# Altium PCB PCB_Proxxon_PWM.PcbDoc
Units mm, origin at the board's own origin, x right, y up, seen from the top; angles counter-clockwise.
Board outline 55 x 30.2 mm, 2 copper layers (Top Layer, Bottom Layer); 29 components, 26 nets, 115 pads, 4 vias.
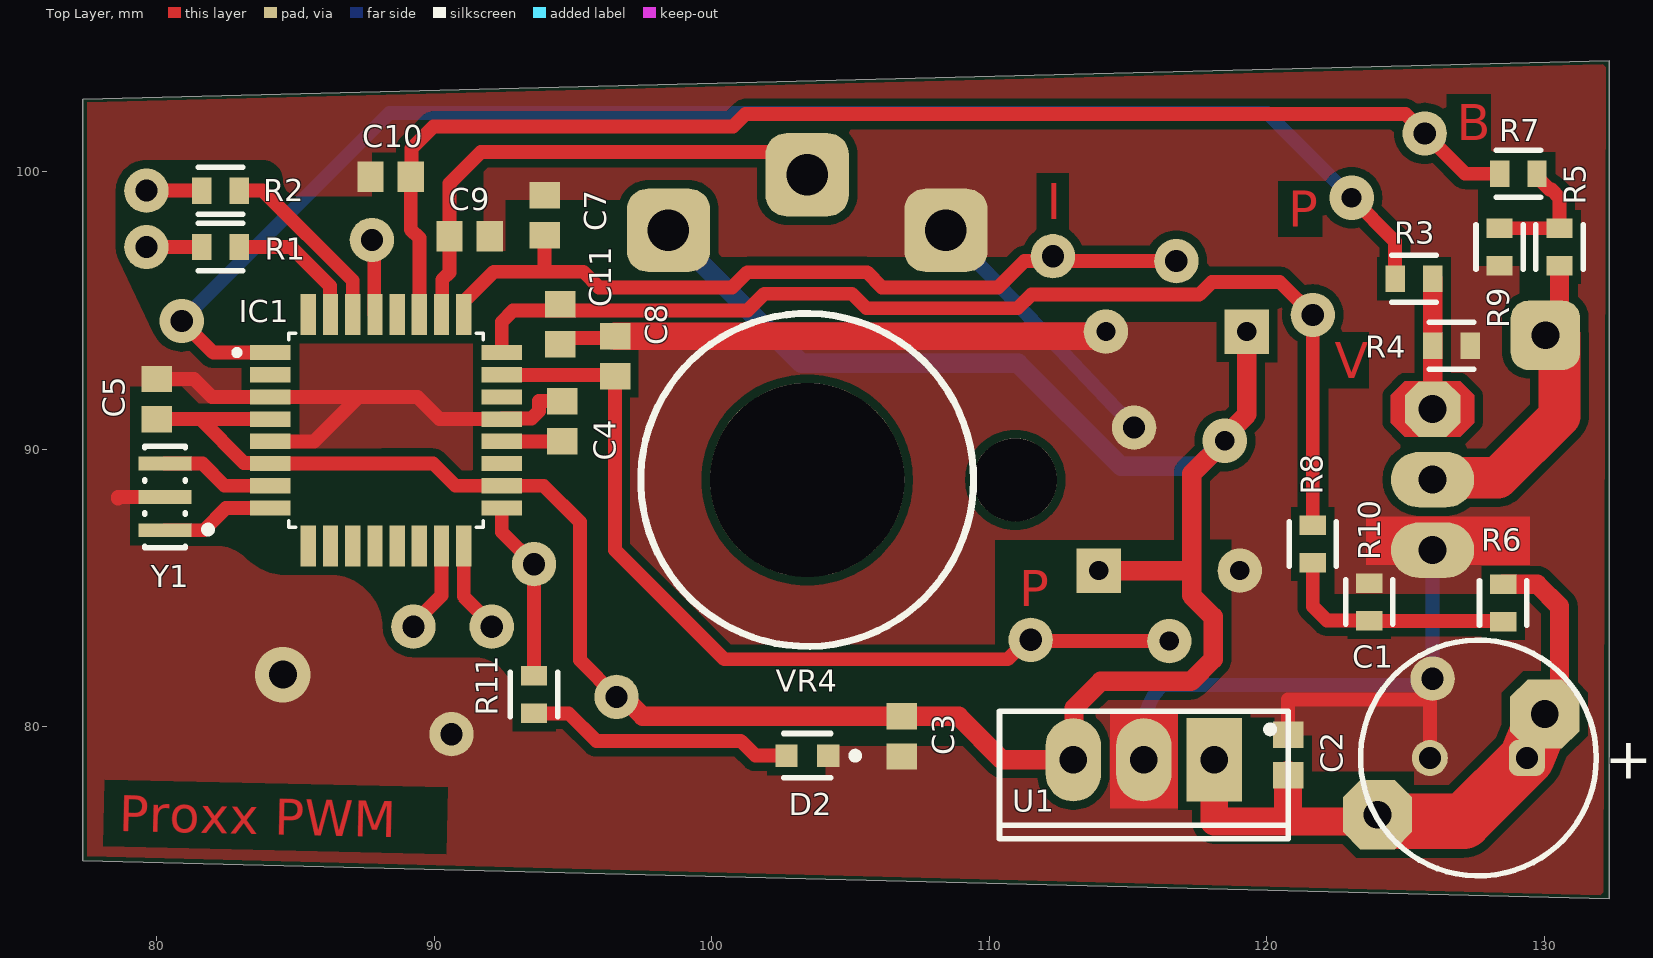
[diagram p0: Top Layer view]
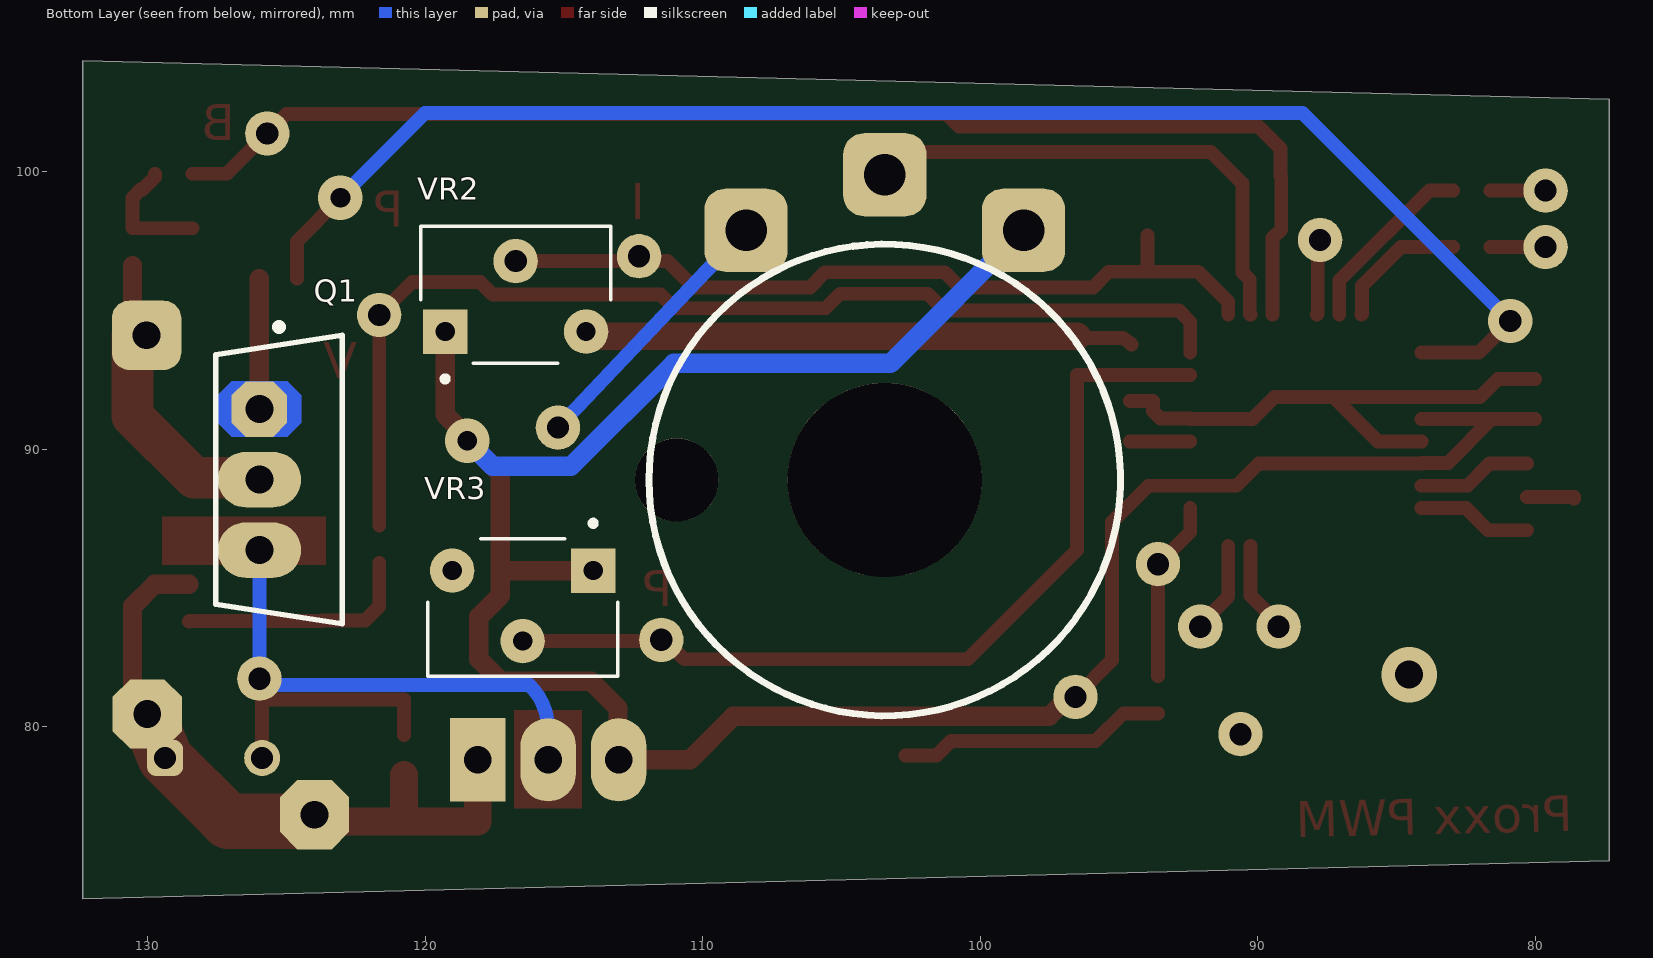
[diagram p1: Bottom Layer view, seen from below]
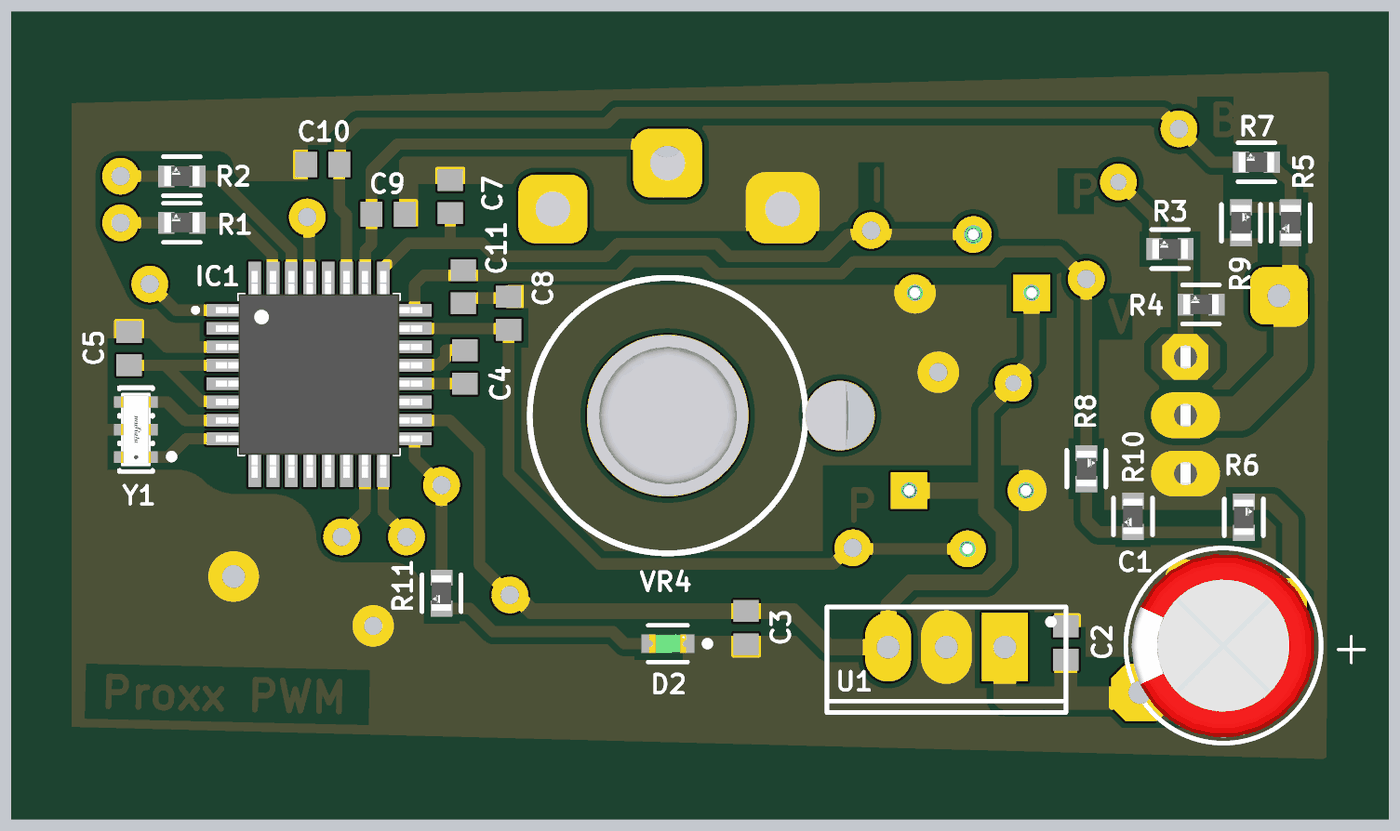
[diagram p2: 3D render of the assembled board from above, using the file's embedded part models]
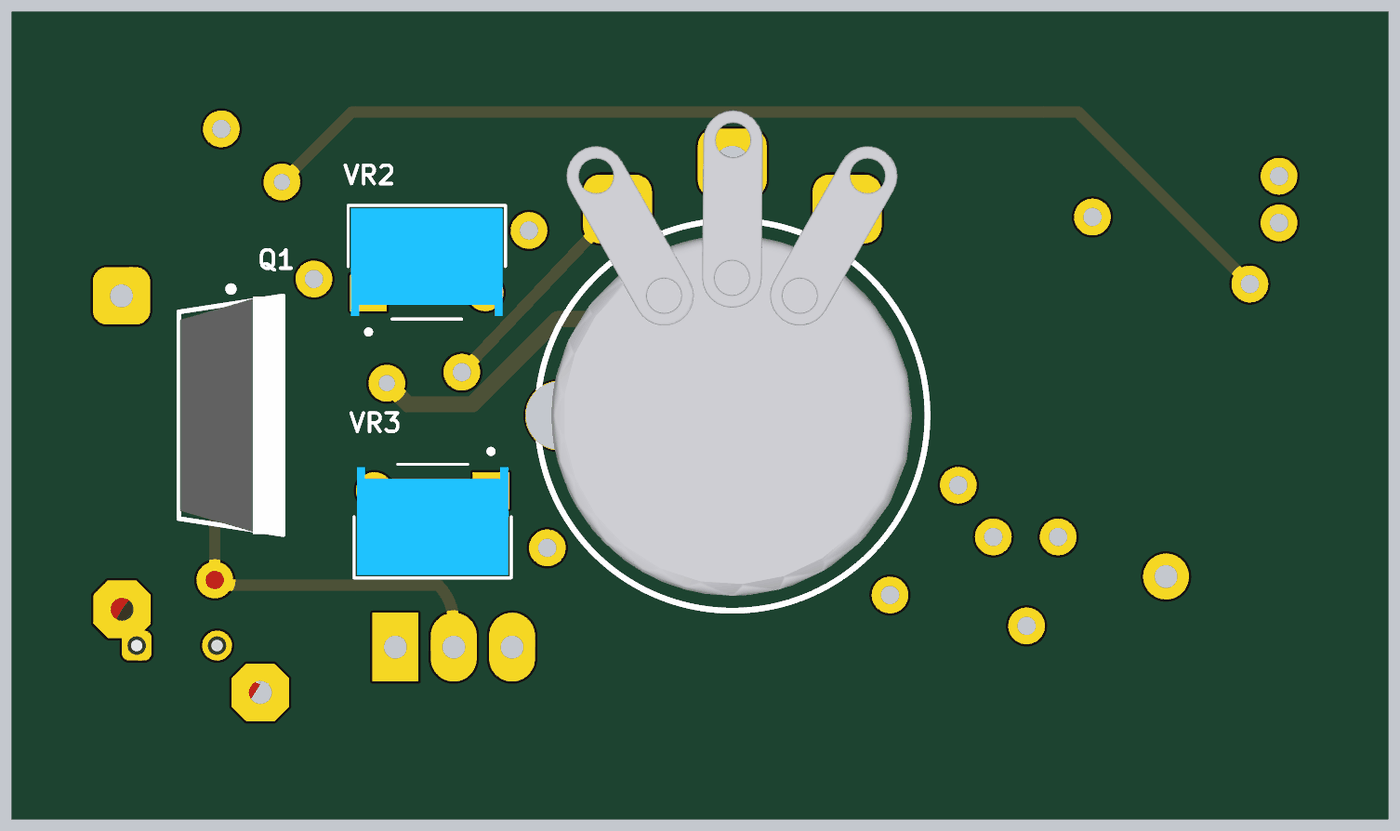
[diagram p3: 3D render of the assembled board from below, using the file's embedded part models]

## Layer stack, top to bottom
Top Solder: solder mask 0.0102, Solder Resist, Dk 3.5
Top Layer: signal copper 0.0356
Dielectric 1: dielectric 0.32, FR-4, Dk 4.8
Bottom Layer: signal copper 0.0356
Bottom Solder: solder mask 0.0102, Solder Resist, Dk 3.5

## Board outline
77.343,75.162 132.342,73.787 132.342,103.987 77.343,102.612

## Design rules (kind name [scope] priority, off if disabled: settings)
Clearance [All] p1: gap=0.3 ignorepadtopadclearanceinfootprint=FALSE except(0.1: Arc-Track Arc-SMDPad Track-Track Track-SMDPad Track-THPad SMDPad-SMDPad)
PlaneClearance [All] p1: clearance=0.6
PlaneConnect [All] p1: planeconnectstyle=Direct reliefexpansion=0.508 reliefentries=4 reliefconductorwidth=0.4 reliefairgap=0.254
PolygonConnect [All] p1: connectstyle=Direct reliefconductorwidth=0.5 reliefentries=4 polygonreliefangle="90 Angle" airgapwidth=0.254
RoutingVias [All] p1: holewidth=0.711 width=1.27 viastyle="Through Hole" minholewidth=0.711 minwidth=1.27 maxholewidth=0.711 maxwidth=1.27
SolderMaskExpansion [All] p1: expansion=0.102 istentingtop=FALSE
SupplyNets "Schematic Supply Nets_3" [InNet('+12V')] p1: voltage=0.000
SupplyNets "Schematic Supply Nets_2" [InNet('5V')] p2: voltage=0.000
SupplyNets "Schematic Supply Nets_1" [InNet('GND')] p3: voltage=0.000
SupplyNets "Schematic Supply Nets" [InNet('Vin')] p4: voltage=0.000
Width [All] p1: maxlimit=3 minlimit=0.15 preferedwidth=0.254
28 further rules are at their usual default settings.

## Components (designator, comment, footprint, x,y, rotation, side; value= is the part's Value field where it differs from the comment)
C1 "100uF" WCAP-ATLL_D8H11.5 127.635,78.867 r0 top
C2 "0.1uF" CAPC1608X92X38ML15T08 120.775,78.975 r270 top
C3 "0.1uF" CAPC1608X92X38ML15T08 106.857,79.644 r90 top
C4 "100nF" CAPC1608X92X38ML15T08 94.615,91.003 r90 top
C5 "1uF" CAPC1608X92X38ML15T08 80,91.803 r270 top
C7 "0.1uF" CAPC1608X92X38ML15T08 93.98,98.425 r270 top
C8 "0.1uF" CAPC1608X92X38ML15T08 96.52,93.345 r270 top
C9 "0.1uF" CAPC1608X92X38ML15T08 91.276,97.663 r180 top
C10 "0.1uF" CAPC1608X92X38ML15T08 88.429,99.822 r0 top
C11 "0.1uF" CAPC1608X92X38ML15T08 94.55,94.5 r90 top
D2 "LG Q396-PS-35" FP-LG_Q396-MFG 103.45,78.95 r180 top
IC1 "ATMEGA328PB-AU" QFP80P900X900X120-32N 88.265,90.678 r0 top
Q1 "IRLZ44" FP-PG-TO220-3-MFG 125.279,88.9 r180 bottom
R1 "1k" FP-MCT0603-MFG 82.296,97.282 r180 top
R2 "1k" FP-MCT0603-MFG 82.296,99.314 r180 top
R3 "100" FP-MCT0603-MFG 125.309,96.139 r180 top
R4 "10k" FP-MCT0603-MFG 126.659,93.726 r180 top
R5 "10k" FP-MCT0603-MFG 130.556,97.282 r270 top
R6 "10k" FP-MCT0603-MFG 128.524,84.455 r90 top
R7 "10k" FP-MCT0603-MFG 129.072,99.924 r180 top
R8 "10k" FP-MCT0603-MFG 121.666,86.574 r90 top
R9 "4k7" FP-MCT0603-MFG 128.397,97.282 r90 top
R10 "4k7" FP-MCT0603-MFG 123.698,84.495 r270 top
R11 "1k" FP-MCT0603-MFG 93.599,81.15 r270 top
U1 "L7805ABV" TO220 115.575,78.8 r180 top
VR2 "KI" TRIM_3362W-1-203LF#1 116.748,95.504 r0 bottom value=1k
VR3 "KP" TRIM_3362W-1-203LF#2 116.494,84.351 r180 bottom value=1k
VR4 "Speed" RES-VAR 103.443,88.887 r0 top value=92k
Y1 "CSTNE20M0VH3C000R0" FP-CSTNE20M0VH3C000R0-MFG 80.3,88.275 r90 top

## Footprints (in the part's own frame and the unit in brackets; to place one, negate y for a bottom-side part, rotate by r counter-clockwise, add the part's x,y. Pads: shape width x height; smd on the part's side, far side on the other; paste and mask are expansions set on the pad)
CAPC1608X92X38ML15T08 [mm] "Chip Capacitor, 2-Leads, Body 1.60x0.80mm, IPC Low Density"
  rect 0.95x1.1 smd: 1(-0.725,0) 2(0.725,0)
  body extent -0.87,-0.48 0.87,0.47, height 0.92
FP-CSTNE20M0VH3C000R0-MFG [mm]
  rect 0.5x1.9 smd paste+0 mask+0: 1(-1.2,0) 2(0,0) 3(1.2,0)
  silkscreen extent -1.83,-1.68 1.83,0.72, body extent -1.78,-1.05 1.78,1.05, height 0.25
FP-LG_Q396-MFG [mm]
  rect 0.8x0.8 smd paste+0 mask+0: 1(-0.75,0) 2(0.75,0)
  silkscreen extent -1.85,-0.8 0.85,0.8, body extent -1.25,-0.55 1.25,0.55, height 0.25
FP-MCT0603-MFG [mm]
  rect 0.7x0.95 smd paste+0 mask+0: 1(-0.675,0) 2(0.675,0)
  silkscreen extent -0.8,-0.85 0.8,0.85, body extent -1.12,-0.58 1.12,0.58, height 0.25
FP-PG-TO220-3-MFG [mm]
  oct 2x2 hole 1 paste-2539.97 mask+0: 1(-0.705,2.54)
  oval 3x2 hole 1 paste-2539.97 mask+0: 2(-0.705,0) 3(-0.705,-2.54)
  Top Layer region: -1.705,3.54 -2.205,3.04 -2.205,2.04 -1.705,1.54 0.295,1.54 0.795,2.04 0.795,3.04 0.295,3.54
  Bottom Layer region: -1.705,3.54 -2.205,3.04 -2.205,2.04 -1.705,1.54 0.295,1.54 0.795,2.04 0.795,3.04 0.295,3.54
  silkscreen extent -2.27,-5.2 2.27,5.62, body extent -2.23,-5.18 2.22,5.18, height 19.15
QFP80P900X900X120-32N [mm]
  rect 1.47x0.55 smd paste+0 mask+0.102: 1(-4.17,2.8) 2(-4.17,2) 3(-4.17,1.2) 4(-4.17,0.4) 5(-4.17,-0.4) 6(-4.17,-1.2) 7(-4.17,-2) 8(-4.17,-2.8) 17(4.17,-2.8) 18(4.17,-2) 19(4.17,-1.2) 20(4.17,-0.4) 21(4.17,0.4) 22(4.17,1.2) 23(4.17,2) 24(4.17,2.8)
  rect 0.55x1.47 smd paste+0 mask+0.102: 9(-2.8,-4.17) 10(-2,-4.17) 11(-1.2,-4.17) 12(-0.4,-4.17) 13(0.4,-4.17) 14(1.2,-4.17) 15(2,-4.17) 16(2.8,-4.17) 25(2.8,4.17) 26(2,4.17) 27(1.2,4.17) 28(0.4,4.17) 29(-0.4,4.17) 30(-1.2,4.17) 31(-2,4.17) 32(-2.8,4.17)
  silkscreen extent -5.47,-3.5 3.5,3.5, body extent -4.5,-4.5 4.5,4.5, height 1.2
RES-VAR [mm]
  round 1.524 hole 7: 0(0,0)
  round 1.524 hole 3: 0(7.5,0)
  rrect50% 3x3 hole 1.5: 1(-5,9) 2(0,11) 3(5,9)
  silkscreen extent -6,-6 6,6, body extent -7.84,-7.85 7.86,13.29, height 14.9
TO220 [mm] "TO, Thru-Hole, Vertical, Heatsink Mounted; 3 In-Line Leads; Pitch 2.54 mm"
  rect 2x3 hole 1: 1(-2.54,0)
  oval 2x3 hole 1: 2(0,0) 3(2.54,0)
  silkscreen extent -5.2,-1.75 5.2,2.85, body extent -5.25,-1.8 5.25,2.9, height 19.7
TRIM_3362W-1-203LF#1 [mm]
  rect 1.6x1.6 hole 0.69: 1(2.54,1.27)
  round 1.6 hole 0.8: 2(0,-1.27)
  round 1.6 hole 0.69: 3(-2.54,1.27)
  silkscreen extent -3.42,-2.53 3.42,3.07, body extent -3.3,-2.41 3.3,2.29, height 6.99
TRIM_3362W-1-203LF#2 [mm]
  rect 1.6x1.6 hole 0.69: 1(2.54,1.27)
  round 1.6 hole 0.69: 2(0,-1.27) 3(-2.54,1.27)
  silkscreen extent -3.42,-2.53 3.42,3.07, body extent -3.3,-2.41 3.3,2.29, height 6.99
WCAP-ATLL_D8H11.5 [mm] "Aluminum Electrolytic Capacitors, 8x11.5mm"
  rrect50% 1.3x1.3 hole 0.8: 1(1.75,0)
  round 1.3 hole 0.8: 2(-1.75,0)
  silkscreen extent -4.25,-4.25 4.25,4.25, body extent -3.99,-4 4,4, height 11.81

## Part data
C1: library part CMP-03913-54007388-2, "Aluminium Electrolytic Capacitor-Leaded Rohs Compliant: Yes", Capacitance=270µF, Case/Package=Radial, Leakage Current=27µA, Max Operating Temperature=105°C, Min Operating Temperature=-55°C, Ripple Current=420mA, Tolerance=20%, Voltage Rating=10V, Diameter=8mm, Height - Seated (Max)=13.0048mm, Impedance=530mΩ, Lead Pitch=3.5052mm, Length=11.5mm, Life (Hours)=7000hours, Mount="Through Hole", Packaging="Tape & Box (TB)", Pitch=3.5mm, Polarity=Polar, RoHS=Compliant
C2 C3 C4 C5 C7 C8 C9 C10 C11: library part CMP-2006-01142-1, Manufacturer=Vitramon, Part Number=VJ0603Y102KXXAC
D2: library part CMP-62016-000069-1, "LED GREEN DIFFUSED 0603 SMD", Case Code (Imperial)=0603, Case Code (Metric)=1608, Color=Green, Forward Current=20mA, Forward Voltage=2V, Lens Color=White, Case/Package=0603, Dominant Wavelength=573nm, Height=0.4mm, Length=1.6mm, Lens Size=0.8mm, Lens Style=Flat, Lens Transparency=Diffused, Luminous Intensity=163mcd, Mount="Surface Mount", Packaging="Tape and Reel", REACH SVHC="No SVHC", RoHS Compliant=Yes, Test Current=20mA, Viewing Angle=120°, Wavelength=573nm, Width=0.8mm
IC1: "AVR AVRВ® ATmega, Functional Safety (FuSa) Microcontroller IC 8-Bit 20MHz 32KB (16K x 16) FLASH 32-TQFP (7x7)", Package=None, Check_prices=https://www.snapeda.com/parts/ATMEGA328PBAU/Microchip+Technology/view-part/?ref=eda, MF="Microchip Technology", MP=ATMEGA328PBAU, SnapEDA_Link=https://www.snapeda.com/parts/ATMEGA328PBAU/Microchip+Technology/view-part/?ref=snap
Q1: library part CMP-32901-000488-1, "MOSFET N-CH 55V 47A TO220AB", Case/Package=TO-220, Continuous Drain Current (ID)=47A, Drain to Source Breakdown Voltage=55V, Drain to Source Resistance=35mR, Gate to Source Voltage (Vgs)=16V, Input Capacitance=1.7nF, Max Operating Temperature=175°C, Max Power Dissipation=110W, Min Operating Temperature=-55°C, Threshold Voltage=2V, Drain to Source Voltage (Vdss)=55V, Element Configuration=Single, Halogen Free="Halogen Free", Height=0.6inch, Lead Free="Lead Free", Length=0.414inch, Max Dual Supply Voltage=55V, Mount="Through Hole", Number of Pins=3, Packaging=Rail/Tube, Power Dissipation=110W, Rds On Max=22mR, REACH SVHC="No SVHC", RoHS Compliant=Yes, Turn-Off Delay Time=26ns, Turn-On Delay Time=11ns, Width=0.185inch
R1 R2 R3 R4 R5 R6 R7 R8 R9 R10 R11: library part CMP-02407-000603-1, "RES SMD 100 OHM 1% 1/8W 0603", Case Code (Imperial)=0603, Case Code (Metric)=1608, Max Operating Temperature=155°C, Min Operating Temperature=-55°C, Power Rating=125mW, Resistance=4.02kR, Tolerance=0.1%, Voltage Rating=75V, Case/Package=0603, Composition="Thin Film", Height=0.45mm, Length=1.55mm, Packaging="Tape and Reel", Weight=6.7E-05oz, Width=0.85mm
U1: library part CMP-0244-00485-1, "Positive Voltage Regulator, 5V, 3-Pin TO-220", ComponentLink1Description="Manufacturer URL", ComponentLink1URL=http://www.st.com, ComponentLink2Description=Datasheet, ComponentLink2URL=http://www.st.com/internet/com/TECHNICAL_RESOURCES/TECHNICAL_LITERATURE/DATASHEET/CD00000444.pdf, ComponentLink3Description="Package Specification", ComponentLink3URL=http://www.st.com/internet/com/TECHNICAL_RESOURCES/TECHNICAL_LITERATURE/PACKAGE_INFORMATION/CD00004649.pdf, DatasheetVersion=16/11/2011, PackageDescription="TO, Thru-Hole, Vertical, Heatsink Mounted; 3 In-Line Leads; Pitch 2.54 mm", PackageReference=TO220, PackageVersion=ver3.0
VR2 VR3: library part 3362W-1-203LF, "1/4 Sq, Thru-Hole, TRIMMER, 20 Kilohms, Cermet, Single Turn", Package="DIP-3 Bourns", Check_prices=https://www.snapeda.com/parts/3362W-1-203LF/Bourns/view-part/?ref=eda, MF=Bourns, MP=3362W-1-203LF, SnapEDA_Link=https://www.snapeda.com/parts/3362W-1-203LF/Bourns/view-part/?ref=snap
VR4: library part Res-var, "1/4 Sq, Thru-Hole, TRIMMER, 20 Kilohms, Cermet, Single Turn", Package="DIP-3 Bourns", Check_prices=https://www.snapeda.com/parts/3362W-1-203LF/Bourns/view-part/?ref=eda, MF=Bourns, MP=3362W-1-203LF, SnapEDA_Link=https://www.snapeda.com/parts/3362W-1-203LF/Bourns/view-part/?ref=snap
Y1: library part CMP-06057-000018-1, "CERAMIC RES 20.0000MHZ 15PF SMD", Capacitance=15pF, Case/Package=SMD/SMT, Frequency=20MHz, Frequency Stability=0.13%, Frequency Tolerance=0.07%, Max Operating Temperature=125°C, Min Operating Temperature=-40°C, Resistor Type=Ceramic, Impedance=40R, Mount="Surface Mount", Packaging="Cut Tape", RoHS Compliant=Yes

## Free pads (board coordinates)
  round 1.6 hole 0.8: 1(79.629,97.282) 1(87.757,97.536) 1(89.25,83.6) 1(90.625,79.725) 1(92.075,83.6) 1(93.599,85.852) 1(96.573,81.069) 2(79.629,99.314) 4(111.5,83.125) 4(115.225,90.775) 4(125.984,81.725) 5(125.7,101.375) 6(121.666,94.834) 7(112.3,96.95)
  round 7 hole 7: 1(103.443,88.887)
  round 3 hole 3: 1(110.943,88.887)
  oct 2.5x2.5 hole 1: 8(124,76.825) 8(130.025,80.45)
  rrect50% 2.5x2.5 hole 1: 8(130.05,94.1)

## Via types
v1: diameter 1.6, hole 0.711, Top Layer to Bottom Layer, 2 vias
v2: diameter 2, hole 1, Top Layer to Bottom Layer, 1 vias
v3: diameter 1.6, hole 0.8, Top Layer to Bottom Layer, 1 vias

## Nets (pads, with @x,y where several pads share a name; then routed paths per layer and width w, separated by ;. In a path a pad name is that pad's centre, name@x,y a point inside that pad or via, vN(x,y) a via of type N, cw(c..) or ccw(c..) an arc to the next point about the centre after c; other vN are vias at no path point)
5V: C3.2 C5.2 IC1.4 IC1.6 IC1.18 pad.1@96.573,81.069 U1.3 VR2.1 VR3.1 VR4.1 | length 91.6
  Top Layer w0.5: C5.2 81.572,91.078 ; IC1.4 81.572,91.078 ; pad.1@96.573,81.069 95.25,82.392 95.25,87.375 93.947,88.678 IC1.18 90.767,88.678 89.967,89.478 88.1,89.478 IC1.6 84.07,89.503 83.147,89.503 81.572,91.078
  Top Layer w0.7: pad.1@96.573,81.069 96.816,81.069 97.516,80.369 C3.2 108.899,80.369 110.468,78.8 U1.3 ; U1.3@113.035,78.775 113.06,78.75 113.06,80.66 114.025,81.625 117.275,81.625 118.075,82.425 118.075,83.95 117.3,84.725 117.3,85.475 ; VR3.1 117.154,85.621 117.3,85.475 ; v1(118.491,90.297) 117.3,89.105 117.3,85.475 ; v1(118.491,90.297) 118.491,90.451 119.288,91.248 VR2.1
  Bottom Layer w0.7: VR4.1 103.239,93.091 111.048,93.091 114.764,89.375 117.569,89.375 v1(118.491,90.297)
+12V: C1.1 C2.2 pad.8@124,76.825 pad.8@130.025,80.45 R6.2 U1.1 | length 24.1
  Top Layer w0.7: R6.2 129.754,85.13 130.556,84.328 pad.8@130.556,80.264
  Top Layer w1: U1.1 118.115,76.581 pad.8@124.206,76.581 ; 120.775,76.748 C2.2
  Top Layer w2: pad.8@124.206,76.581 127.099,76.581 C1.1 pad.8@130.025,80.45
BEMF: pad.8@130.05,94.1 Q1.2 R5.2 | length 10.9
  Top Layer w0.7: pad.8@130.556,94.107 R5.2
  Top Layer w1.5: Q1.2 126.051,88.967 128.337,88.967 130.556,91.186 pad.8@130.556,94.107
BEMF_PIN: C10.2 IC1.27 pad.5 R7.2 | length 46.7
  Top Layer w0.5: IC1.27 89.465,97.606 89.154,97.917 C10.2 89.184,99.852 89.184,100.834 89.975,101.625 100.775,101.625 101.225,102.075 125.001,102.075 127.152,99.924 R7.2
GND: C1.2 C2.1 C3.1 C4.2 C5.1 C7.1 C8.1 C9.1 C10.1 C11.1 D2.1 IC1.3 IC1.5 IC1.21 pad.1@90.625,79.725 pad.4@115.225,90.775 pad.4@125.984,81.725 Q1.3 R4.1 R9.1 R10.1 U1.2 VR2.3 VR3.3 VR4.3 Y1.2 | length 77
  Top Layer w0.5: 78.6,88.225 78.6,88.275 Y1.2 ; C5.1 81.347,92.528 81.997,91.878 IC1.3 87.275,91.878 ; IC1.5 85.675,90.278 87.275,91.878 ; C11.1 94.85,94 96.22,94 C8.1 ; C4.2 93.775,91.728 93.775,91.375 93.503,91.103 92.46,91.103 IC1.21 90.197,91.078 89.397,91.878 87.275,91.878 ; C2.1 120.775,80.975 125.885,80.975 C1.2
  Top Layer w1: C8.1 114.208,94.07 VR2.3
  Bottom Layer w0.5: VR4.3 109.193,97.137 pad.4@115.225,90.775 ; U1.2 115.575,79.87 cw(c117.88,79.87) 116.25,81.5 125.441,81.5 ccw(c125.441,82.268) 125.984,81.725 Q1.3 ; C1.2 ccw(c125.885,78.966) C1.2@125.984,78.966
  other v2: 84.55,81.875
I_PIN: C7.2 IC1.25 pad.7 VR2.2 | length 29
  Top Layer w0.5: IC1.25 91.065,95.308 92.15,96.393 93.98,96.393 ; C7.2 93.98,96.393 ; VR2.2 112.3,96.774 111.274,96.774 110.325,95.825 106.143,95.825 105.593,96.375 101.286,96.375 100.736,95.825 95.94,95.825 95.372,96.393 93.98,96.393
MISO: IC1.16 pad.1@92.075,83.6 | length 3.4
  Top Layer w0.5: IC1.16 91.065,84.694 92.075,83.684 pad.1@92.075,83.566
MOSI: IC1.15 pad.1@89.25,83.6 | length 3.3
  Top Layer w0.5: pad.1@89.25,83.6 89.25,83.708 90.265,84.723 IC1.15
NetC4_1: C4.1 IC1.20 | length 2.2
  Top Layer w0.5: IC1.20 C4.1
NetD2_2: D2.2 R11.2 | length 9.7
  Top Layer w0.5: R11.2 94.85,80.475 95.85,79.475 101.05,79.475 101.575,78.95 D2.2
NetIC1_30: IC1.30 R2.1 | length 6.7
  Top Layer w0.5: R2.1 83.82,99.314 87.065,96.069 IC1.30
NetIC1_31: IC1.31 R1.1 | length 4.9
  Top Layer w0.5: R1.1 84.836,97.282 86.24,95.878 86.24,94.873 IC1.31
NetQ1_1: Q1.1 R3.1 R4.2 | length 4.7
  Top Layer w0.7: Q1.1 R3.1
NetR5_1: R5.1 R7.1 R9.2 | length 4.5
  Top Layer w0.5: R9.2 R5.1 130.556,99.057 130.263,99.35 130.196,99.35 129.747,99.799 R7.1
NetR6_1: R6.1 R8.1 R10.2 | length 8.7
  Top Layer w0.5: R8.1 121.666,84.328 122.174,83.82 R10.2 123.718,83.8 128.504,83.8 R6.1
P_PIN: C8.2 IC1.23 pad.4@111.5,83.125 VR3.2 | length 32.2
  Top Layer w0.5: IC1.23 92.438,92.675 96.518,92.675 C8.2@96.52,92.673 ; C8.2 96.52,86.36 100.457,82.423 110.657,82.423 111.315,83.081 VR3.2
PWM_PIN: IC1.1 R3.2 | length 53.8
  Top Layer w0.5: v3(80.899,94.615) 82.036,93.478 IC1.1 ; v1(123.063,99.06) 124.634,97.489 R3.2
  Bottom Layer w0.5: v3(80.899,94.615) 88.392,102.108 120.015,102.108 v1(123.063,99.06)
RESET: IC1.29 pad.1@87.757,97.536 | length 2.7
  Top Layer w0.5: pad.1@87.757,97.536 87.84,97.453 87.84,94.873 IC1.29
RX: pad.2 R2.2 | length 2
  Top Layer w0.5: pad.2 R2.2
SCK: IC1.17 pad.1@93.599,85.852 R11.1 | length 6.5
  Top Layer w0.5: IC1.17 92.435,87.016 93.599,85.852 R11.1
SPEED_PIN: C9.2 IC1.26 VR4.2 | length 18.5
  Top Layer w0.5: IC1.26 90.29,94.873 90.29,96.102 90.551,96.363 C9.2 90.551,99.568 91.694,100.711 102.619,100.711 VR4.2
TX: pad.1@79.629,97.282 R1.2 | length 2
  Top Layer w0.5: pad.1@79.629,97.282 R1.2
Vin: 
VMOT_PIN: C11.2 IC1.24 pad.6 R8.2 | length 39.4
  Top Layer w0.5: IC1.24 92.435,94.585 92.846,94.996 94.55,94.996 101.296,94.996 101.9,95.6 105.05,95.6 105.575,95.075 111.025,95.075 111.525,95.575 117.575,95.575 118.025,96.025 120.475,96.025 pad.6 R8.2
XTAL1: IC1.7 Y1.3 | length 4.1
  Top Layer w0.5: Y1.3 81.65,89.475 82.447,88.678 IC1.7
XTAL2: IC1.8 Y1.1 | length 4.1
  Top Layer w0.5: Y1.1 81.7,87.075 82.503,87.878 IC1.8
pads on no net: IC1.2 IC1.9 IC1.10 IC1.11 IC1.12 IC1.13 IC1.14 IC1.19 IC1.22 IC1.28 IC1.32 VR4.0

## Polygon pours and split planes (outlines as drawn)
GND on Top Layer "GND_poly" (solid, remove dead copper, pour order 1): 77.5,102.5 132.225,103.875 132.125,73.925 77.5,75.325
GND on Top Layer "gnd2" (solid, remove dead copper, pour order 2): 85.175,93.775 91.35,93.775 91.35,87.6 85.175,87.6

## Other copper
Top Layer:
  rectangle net GND: 114.35,77.05 116.815,80.6
  rectangle net GND: 123.575,85.825 129.5,87.575
  pour cut-out: 89.121,82.507 91.443,82.507 cw(c91.443,81.125) 92.825,81.125 ccw(c92.824,82.601) 94.3,82.601 94.3,83.05 ccw(c94.258,83.05) 94.258,83.092 89.207,83.092 ccw(c89.207,83.006) 89.121,83.006
  pour cut-out: 84.89,85.473 86.234,85.473 cw(c86.234,83.557) 88.15,83.557 ccw(c88.15,84.382) 88.975,84.382 88.975,85.6 ccw(c88.187,85.6) 88.187,86.388 84.89,86.388
  pour cut-out: 78.529,99.357 78.529,97.239 79.175,97.239 79.175,99.357
  pour cut-out: 79.586,100.414 83.861,100.414 cw(c83.804,99.68) 84.537,99.623 ccw(c85.118,99.68) 85.175,99.1 85.75,99.1 cw(c85.275,99.1) 85.275,98.625 79.586,98.625
  pour cut-out: 79.899,94.154 78.629,96.821 81.025,96.821 81.025,93.868
  pour cut-out: 81.7,86.524 82.105,86.524 cw(c82.105,84.905) 83.25,86.05 ccw(c84.643,87.443) 84.643,85.473 84.89,85.473 84.89,87.303 ccw(c84.832,87.245) 84.832,87.327 82.731,87.327 ccw(c82.731,86.776) 82.342,87.166
  pour cut-out: 82.9,90.825 83.375,90.825 83.375,90.054 82.9,90.054
  pour cut-out: 92.875,94.6 97.375,94.6 97.375,93.125 92.875,93.125
  pour cut-out: 93.3,92.375 96.025,92.375 96.025,90.625 93.3,90.625
  pour cut-out: 103.4,79.718 104.1,79.718 104.1,78.25 103.4,78.25
  pour cut-out: 121.625,78.725 121.625,79.675 120.225,79.675 120.225,78.725
  pour cut-out: 93.425,98.175 93.425,98.975 94.525,98.975 94.525,98.175
  pour cut-out: 87.775,100.672 87.775,99.1 88.85,99.1 88.85,100.672
  pour cut-out: 92.73,97.125 92.73,96.813 91.431,96.813 91.431,97.125
  pour cut-out: 91.102,100.475 91.76,100.475 91.76,96.813 91.102,96.813
  pour cut-out: 79.55,92.252 80.898,92.252 81.5,91.65 79.475,91.65 79.475,92.177
  pour cut-out: 109.25,79.718 109.25,79.3 103.875,79.3 103.875,78.25 103.4,78.25 103.4,79.718
  pour cut-out: 125.3,77.675 125.3,78.375 121.475,78.375 121.475,77.675
  pour cut-out: 120.225,78.725 120.225,79.225 121.625,79.225 121.625,78.725
  pour cut-out: 122.441,84.775 122.441,85.249 122.125,85.249 122.125,84.125 128.1,84.125 128.1,84.775
  pour cut-out: 127.622,99.525 127.622,96.6 130.45,96.6 130.45,99.525
  pour cut-out: 89.207,82.5 93.325,82.5 93.325,83.684 89.207,83.684
  pour cut-out: 88.15,83.557 88.15,87.075 93.25,87.075 93.25,83.557
  pour cut-out: 88.85,99.1 84.425,99.1 84.425,97.025 88.825,97.025 88.825,98.425
  pour cut-out: 100.22,96.918 117.6,96.918 117.6,95.35 118.3,95.35 118.3,94.575 100.24,94.575 100.24,96.895
  pour cut-out: 110.2,86.733 118.724,86.733 118.724,82.825 110.2,82.825
  pour cut-out: 129.126,97.525 129.126,94.975 130.025,94.975 130.025,97.525
  pour cut-out: 92.575,98.975 92.575,96.944 96.75,96.944 96.75,98.975
  pour cut-out: 119.2,80.325 120.275,80.325 120.275,78.925 119.225,78.925 119.225,80.35
  pour cut-out: 95.2,92.225 96.1,92.325 96.1,90.675 95.05,90.925 95.175,92.225
  pour cut-out: 79.05,86.525 79.05,92.252 79.55,92.252 79.55,86.525
  text "B" at 126.854,101.129 h1.3
  text "I" at 112.079,98.279 h1.3
  text "P" at 120.779,98.004 h1.3
  text "V" at 122.454,92.554 h1.3
  text "P" at 111.079,84.329 h1.3
  text "Proxx PWM" at 78.631,76.219 h1.3 r358.72

## Silkscreen, mask and mechanical layers (free items; w line width, h text height)
Mechanical 3:
  lines w0.254: 75,75.15 77.225,75.15 77.225,102.625 75,102.625 ; 77.344,72.801 77.344,75.035 132.228,73.667 132.345,73.779 ; 77.35,104.95 77.35,102.743 132.229,104.115 ; 132.35,71.425 132.35,73.775 ; 132.35,104 132.35,106.35 ; 134.695,73.779 132.47,73.779 132.475,104 134.7,104

## Text inside footprints (layer, text, board x,y; h text height)
C1: Top Overlay "+" at 132.185,78.117 h1.5